# EAGLE board RoverEncoder (EAGLE 6.4)
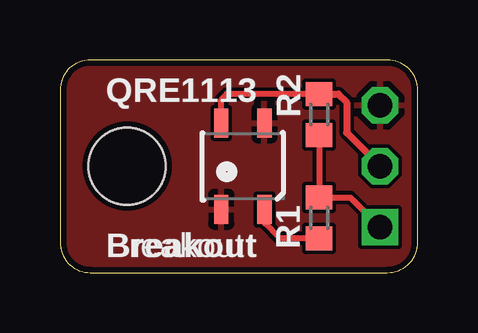
[diagram p0: board, top side]
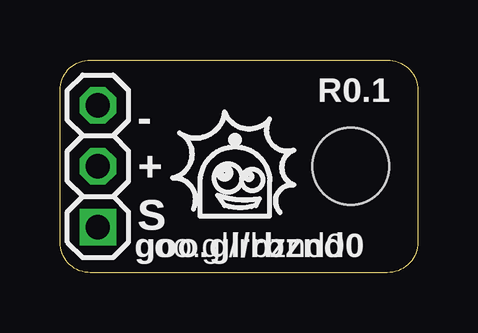
[diagram p1: board, bottom side, seen from below]

Size 14.91 x 8.88 mm. Coordinates in mm from the lower left corner, seen from the top.
Outline: 0,7.61 0,1.27 arc90 1.27,0 13.64,0 arc90 14.91,1.27 14.91,7.61 arc90 13.64,8.88 1.27,8.88 arc90 0,7.61
Copper layers (1*16): Top 0.0356mm / dielectric 1.5011mm / Bottom 0.0356mm
Design rules "LaenPCBOrder *": minimum track width 6mil, minimum drill 13mil, track to track 6mil, track to pad 6mil, pad to pad 6mil, via to via 6mil, smd to smd 6mil, copper to edge 10mil, drill to drill 6mil, minimum pad ring 7mil, minimum via ring 7mil, stop-mask expansion 4mil, vias tented up to drill 20mil, thermal gap 10mil
Holes 3.2 mm at 2.79,4.45

## Footprints (pad centres in the part's own frame; a part is rotated, then mirrored left to right if it is on the bottom)
1X03-S = drill 1.016 square: 1 -2.54,0 | drill 1.016 octagon: 2 0,0; 3 2.54,0
R0603 = smd 1 x 1.1: 1 -0.85,0; 2 0.85,0
QRE1113 = smd 1.2 x 0.6: 1 -1.8,-0.9; 2 1.8,-0.9; 3 1.8,0.9; 4 -1.8,0.9

## Placement (x,y rotation side)
JP1  [1X03-S]  13.34,4.45 90 bottom
R1  100  [R0603]  10.79,2.29 90 top
R2  10K  [R0603]  10.79,6.6 270 top
U1  QRE1113  [QRE1113]  7.62,4.45 90 top

## Library data of the parts
JP1 = pinhead-2
R1 R2 = rcl
U1 = SparkFun

## Nets
GND: JP1.3 U1.2 U1.4
N$1: R1.1 U1.1
OUT: JP1.2 R2.1 U1.3
VCC: JP1.1 R1.2 R2.2

## Tracks (layer width: path | path; a pad name or v marks a point on that pad's centre or on a via)
GND
  pour Top: 0,0 14.99,0 14.99,8.89 0,8.89
N$1
  Top 0.254: R1.1 9.16,1.44 8.55,2.05 8.55,2.62 U1.1
OUT
  Top 0.254: R2.1 6.95,7.45 6.72,7.23 U1.3
  Top 0.289: R2.1 11.6,7.45 11.94,7.11 11.94,5.84 JP1.2
VCC
  Top 0.254: R2.2 R1.2 12.1,3.14 JP1.1

## Text on the board
bPlace: goo.gl/rbznd0
tNames: QRE1113 | Breakout
bNames: R0.1 | - | + | S
tsilk: QRE1113 | R2 | Breakout | R1
bsilk: R0.1 | - | + | S | goo.gl/rbznd0